# Altium PCB DAP-PCB.PcbDoc (part 5 of 5)
Units mm, origin at the board's own origin, x right, y up, seen from the top; angles counter-clockwise.
Board outline 54.75 x 54.75 mm, 6 copper layers (L1 (SIG/PWR), L2 (GND), L3 (SIG), L4 (PWR), L5 (GND), L6 (SIG/PWR)), stack 1.65 mm thick; 270 components, 172 nets, 891 pads, 308 vias.
Unrouted connection lines stored in the file: 5.
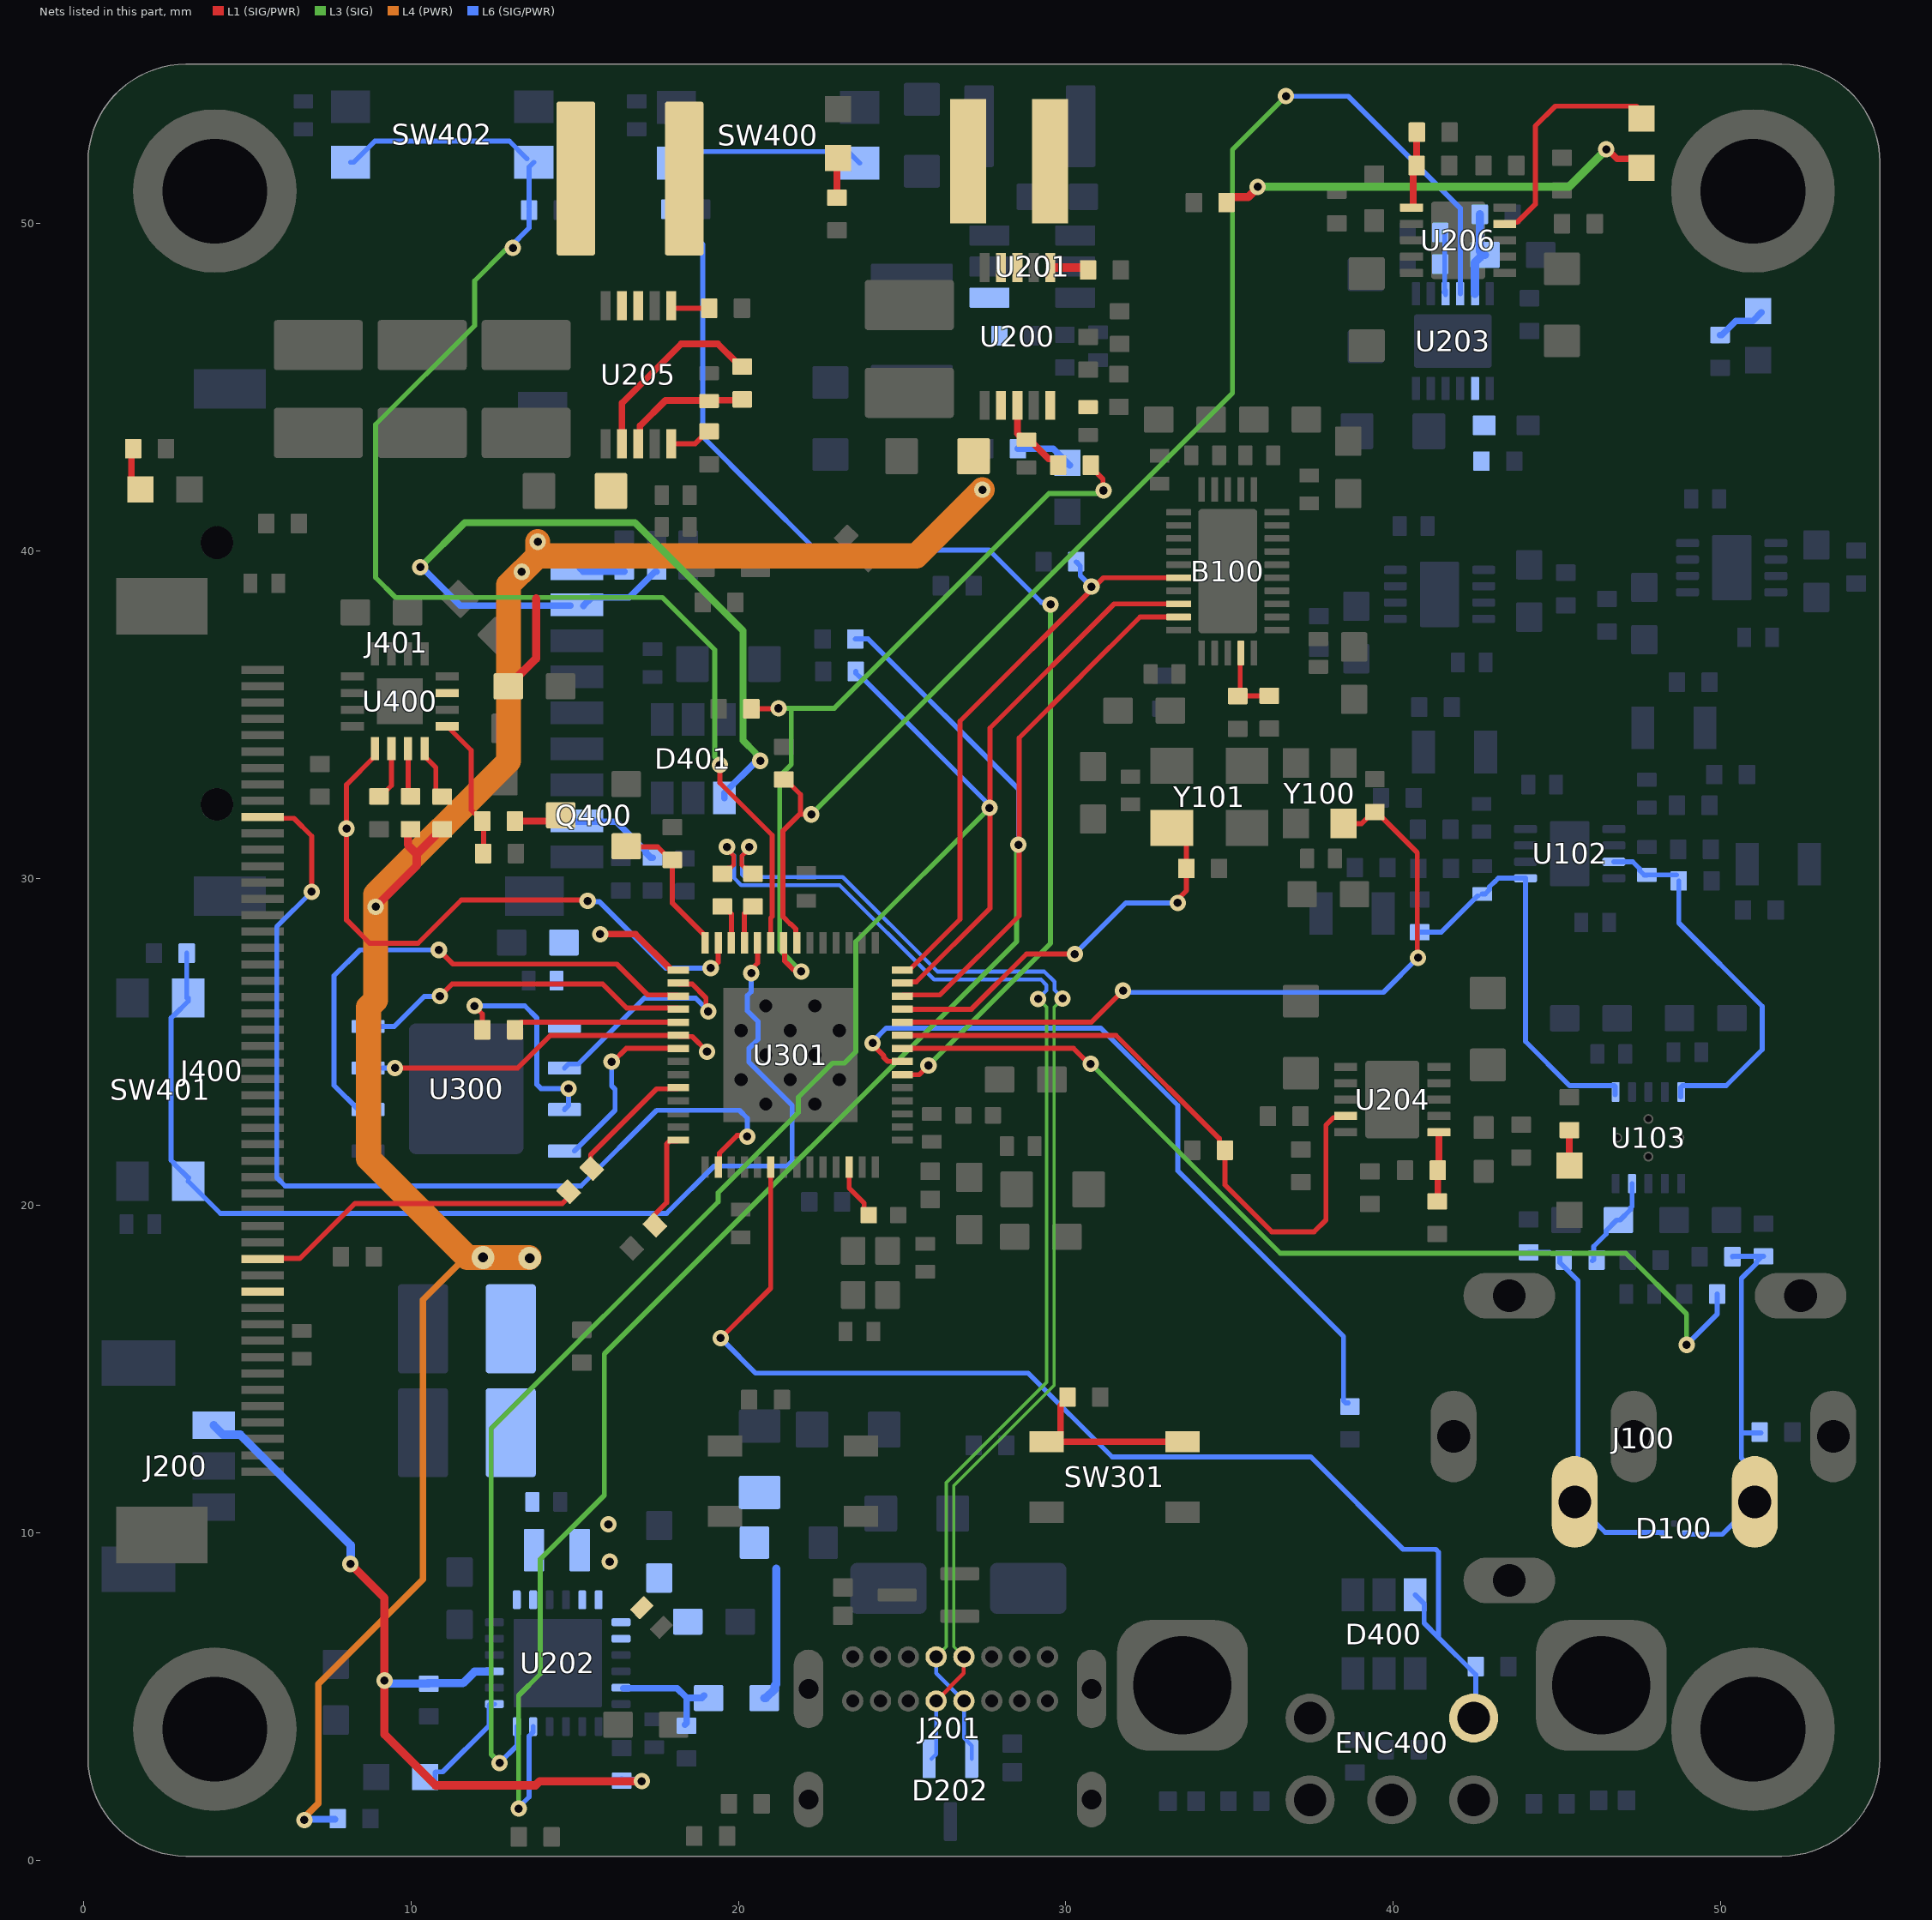
[diagram p7: the nets of this part, all layers, seen from the top]

## Via types
v1: diameter 0.5, hole 0.25, L1 (SIG/PWR) to L6 (SIG/PWR), tented both sides, 268 vias
v2: diameter 0.7, hole 0.35, L1 (SIG/PWR) to L6 (SIG/PWR), tented both sides, 23 vias
v3: diameter 0.7, hole 0.3, L1 (SIG/PWR) to L6 (SIG/PWR), tented both sides, 6 vias
v4: diameter 1.25, hole 0.75, L1 (SIG/PWR) to L6 (SIG/PWR), 6 vias
v5: diameter 0.4/0.4/0.4/0.4/0.4/0.4 (per signal layer), hole 0.2, L1 (SIG/PWR) to L6 (SIG/PWR), tented both sides, 5 vias

## Nets (pads, with @x,y where several pads share a name; then routed paths per layer and width w, separated by ;. In a path a pad name is that pad's centre, name@x,y a point inside that pad or via, vN(x,y) a via of type N, cw(c..) or ccw(c..) an arc to the next point about the centre after c; other vN are vias at no path point) (continued)
NetD204_A: D204.A R242.1 | length 13.5
  L1 (SIG/PWR) w0.203: v1@46.634,52.197 46.845,51.986 47.327,51.986 D204.A@47.6,51.713
  L1 (SIG/PWR) w0.254: R242.1@34.917,50.648 34.917,50.698 35.04,50.821 35.581,50.821 v1@35.89,51.13
  L3 (SIG) w0.254: v1@35.814,51.13 45.373,51.13 46.437,52.194 46.437,52.242 v1@46.431,52.248
  other v1: 35.865,51.13 46.517,52.274
NetD204_C: D204.C U206.4 | length 7.5
  L1 (SIG/PWR) w0.152: U206.4@43.417,49.996 43.465,50.045 43.797,50.045 44.348,50.597 44.348,52.984 44.958,53.594 47.442,53.594 D204.C@47.835,53.201
NetD205_C: D205.C R249.1 | length 1.8
  L6 (SIG/PWR) w0.203: R249.1@28.542,43.129 29.616,43.129 D205.C@30.124,42.621
NetD206_A: D206.A R250.1 | length 1.3
  L1 (SIG/PWR) w0.203: R250.1@23.012,50.8 23.012,51.892 D206.A@23.139,52.019
NetD207_A: D207.A R251.1 | length 1
  L1 (SIG/PWR) w0.203: D207.A@45.39,21.222 45.39,22.174 R251.1@45.415,22.2
NetD208_C: D208.C R252.1 | length 1.6
  L6 (SIG/PWR) w0.203: R252.1@49.994,46.601 50.044,46.601 50.478,47.035 50.998,47.035 D208.C@51.257,47.295
NetD209_A: D209.A R253.1 | length 1.2
  L1 (SIG/PWR) w0.203: R253.1@1.524,42.977 1.501,42.977 1.455,42.931 1.455,42.157 D209.A@1.727,41.885
NetD401_1: D401.1 J401.2 R416.1 | length 25.2
  L3 (SIG) w0.203: v1(10.278,39.508) 11.638,40.869 16.84,40.869 20.142,37.567 20.142,34.214 20.527,33.829 20.527,33.809 20.681,33.655 v1@20.701,33.655
  L6 (SIG/PWR) w0.203: v1@10.312,39.522 11.501,38.334 J401.2@14.861,38.334 ; J401.2@15.265,38.329 15.519,38.582 16.663,38.582 17.451,39.37 R416.1@17.501,39.37 ; D401.1@19.568,32.455 19.568,32.605 20.549,33.585 v1@20.549,33.604
  other v1: 20.666,33.59
NetJ401_1: J401.1 R417.1 | length 1.4
  L6 (SIG/PWR) w0.203: J401.1@15.164,39.472 15.257,39.378 R417.1@16.51,39.378
NetJ401_8: J401.8 R418.1 | length 3
  L6 (SIG/PWR) w0.203: J401.8@14.861,31.734 16.272,31.734 17.175,30.831 17.175,30.781 17.324,30.632 R418.1@17.374,30.632
NetQ400_1: Q400.1 R425.2 U301.28 | length 4.5
  L1 (SIG/PWR) w0.152: Q400.1@16.586,30.963 17.535,30.963 17.933,30.564 R425.2@17.983,30.564 17.983,29.243 18.984,28.243 U301.28@18.984,28.028
NetQ400_3: Q400.3 R423.1 | length 1.5
  L1 (SIG/PWR) w0.203: R423.1@13.175,31.75 14.3,31.75 Q400.3@14.554,32.004
NetR119_1: R119.1 U301.7 | length 23
  L1 (SIG/PWR) w0.152: v1(24.101,24.968) 24.101,24.916 24.441,24.576 24.441,24.524 24.559,24.407 25.005,24.407 U301.7@25.009,24.403
  L6 (SIG/PWR) w0.152: v1(24.101,24.968) 24.101,25.007 24.519,25.425 31.064,25.425 33.426,23.063 33.426,21.066 38.49,16.002 38.49,14.034 38.555,13.97 R119.1@38.633,13.97
NetR128_1: R128.1 U301.8 | length 30
  L1 (SIG/PWR) w0.152: U301.8@25.009,24.803 30.239,24.803 v1@30.683,24.359
  L3 (SIG) w0.152: v1(30.763,24.333) 36.555,18.542 47.117,18.542 48.971,16.688 48.971,15.909 49.005,15.875 v1@49.022,15.875
  L6 (SIG/PWR) w0.152: v1(48.971,15.748) 49.903,16.68 R128.1@49.903,17.297
NetR203_1: R203.1 R308.2 U301.22 | length 23.9
  L1 (SIG/PWR) w0.152: R308.2@20.396,35.179 21.158,35.179 v1@21.209,35.23 ; U301.22@21.384,28.028 21.414,27.998 21.414,27.474 21.521,27.366 21.668,27.219 21.854,27.219 v1(21.92,27.153) ; R203.1@30.769,42.621 30.769,42.571 31.14,42.2 v1@31.14,42.062
  L3 (SIG) w0.152: v1(21.226,35.196) 21.615,35.196 ; v1(21.92,27.153) 21.26,27.813 21.26,33.122 21.615,33.477 21.615,35.196 ; v1@31.166,41.758 29.489,41.758 22.927,35.196 21.615,35.196
  other v1: 31.158,41.85
NetR204_1: R204.1 U201.4
NetR207_2: R207.2 U200.1 | length 1.3
  L1 (SIG/PWR) w0.254: U200.1@29.524,48.665 30.759,48.665 R207.2@30.759,48.616
NetR219_1: R219.1 R226.2 U203.3 | length 2.1
  L6 (SIG/PWR) w0.152: U203.3@41.552,47.911 U203.3@41.58,47.939 ; R226.2@41.58,49.759 41.58,48.768 U203.3@41.58,47.939 ; U203.3@41.605,47.862 41.58,47.888 U203.3@41.58,47.939 ; U203.3@41.609,47.84 41.609,47.911 41.609,47.968 U203.3@41.58,47.939
NetR220_1: R220.1 R224.2 U203.5 | length 2.6
  L6 (SIG/PWR) w0.254: U203.5@42.505,47.862 42.505,48.816 42.666,48.977 R220.1@42.736,49.047 ; R224.2@42.655,50.292 42.655,49.155 42.763,49.047 R220.1@42.813,49.047
NetR222_1: R222.1 R228.2 U204.6 | length 2.1
  L1 (SIG/PWR) w0.203: R222.1@41.326,20.168 41.369,20.21 R228.2@41.369,21.082 41.405,21.118 U204.6@41.405,22.241
NetR223_1: R223.1 U204.4 U301.9 | length 19.8
  L1 (SIG/PWR) w0.152: U301.9@25.009,25.202 31.541,25.202 34.692,22.051 34.692,21.915 34.738,21.869 R223.1@34.874,21.869 ; R223.1@34.866,21.692 34.866,20.633 36.297,19.202 37.592,19.202 37.951,19.561 37.951,22.462 38.18,22.692 38.506,22.692 U204.4@38.555,22.741
NetR238_1: R238.1 U205.10 | length 1.3
  L1 (SIG/PWR) w0.152: U205.10@17.942,43.283 18.679,43.283 19.033,43.637 R238.1@19.126,43.637
NetR239_2: R239.2 U205.1 | length 1.2
  L1 (SIG/PWR) w0.152: U205.1@17.942,47.497 18.017,47.422 19.101,47.422 R239.2@19.126,47.447
NetR243_1: R243.1 R245.2 U206.6 | length 2.3
  L1 (SIG/PWR) w0.203: U206.6@40.615,50.521 40.615,51.675 R245.2@40.722,51.782 40.726,51.786 40.726,52.689 R243.1@40.818,52.781
NetR302_2: R302.2 SW301.1 SW301.2 | length 5.9
  L1 (SIG/PWR) w0.203: R302.2@30.056,14.148 30.056,14.098 29.844,13.886 29.844,13.008 29.621,12.784 SW301.1@29.421,12.784 33.536,12.784 SW301.2@33.553,12.802
NetR303_2: R303.2 U301.38 | length 4
  L1 (SIG/PWR) w0.152: R303.2@15.482,21.149 15.482,21.553 17.498,23.569 18.125,23.569 U301.38@18.159,23.603 ; R303.2@15.658,21.096 R303.2@15.723,21.031
NetR304_1: R304.1 U301.25 | length 1.2
  L1 (SIG/PWR) w0.152: U301.25@20.184,28.028 20.184,28.929 20.338,29.083 R304.1@20.371,29.083
NetR305_2: R305.2 U301.42 | length 2.8
  L1 (SIG/PWR) w0.152: R305.2@17.399,19.685 17.805,20.091 17.805,21.879 17.895,21.969 18.125,21.969 U301.42@18.159,22.003
NetR306_1: R306.1 U301.26 | length 1.1
  L1 (SIG/PWR) w0.152: R306.1@19.685,29.083 19.685,29.014 19.784,28.915 U301.26@19.784,28.028
NetR420_2: R420.2 U400.3 | length 1.6
  L1 (SIG/PWR) w0.152: U400.3@9.906,33.96 9.906,32.563 R420.2@10.033,32.436
NetR421_2: R421.2 U400.4 | length 1.7
  L1 (SIG/PWR) w0.152: U400.4@10.414,33.96 10.414,33.729 10.754,33.39 10.754,32.604 R421.2@10.897,32.461
NetR422_2: R422.2 U400.2 | length 1.6
  L1 (SIG/PWR) w0.152: R422.2@9.068,32.537 9.1,32.537 9.398,32.835 U400.2@9.398,33.96
NetR423_2: R423.2 R424.2 U400.5 | length 4.4
  L1 (SIG/PWR) w0.152: U400.5@11.1,34.646 11.836,33.909 11.836,32.088 11.951,31.974 12.001,31.974 12.175,31.8 R423.2@12.175,31.75 ; R424.2@12.217,30.734 R423.2@12.217,31.75
NetU301_27: U301.27 U400.1 | length 19.4
  L1 (SIG/PWR) w0.152: U400.1@8.89,33.96 8.89,33.729 8.026,32.866 v1(8.026,31.521) 8.026,28.727 8.738,28.016 10.211,28.016 11.532,29.337 15.367,29.337 v1(15.392,29.312) ; v1@19.177,27.229 19.384,27.436 U301.27@19.384,28.028
  L6 (SIG/PWR) w0.152: v1(15.392,29.312) 15.413,29.291 15.744,29.291 17.774,27.26 v1@19.222,27.26
  other v1: 19.151,27.26
PG_LDO-: R241.1 U203.4 U301.21 | length 43.3
  L1 (SIG/PWR) w0.152: R241.1@21.387,33.02 21.437,33.02 21.895,32.562 21.895,31.953 v1(22.225,31.953) ; U301.21@21.784,28.028 21.75,28.061 21.75,28.456 21.599,28.607 21.584,28.607 21.363,28.828 21.363,31.455 21.861,31.953
  L3 (SIG) w0.152: v1(22.225,31.953) 35.097,44.825 35.097,52.267 v1(36.728,53.899)
  L6 (SIG/PWR) w0.152: v1(36.728,53.899) 38.633,53.899 42.055,50.477 U203.4@42.055,47.862
PMID_BQ: C200.2 U202.20
POWER: R401.2 SW401.1 SW401.3 U301.24 | length 34.5
  L1 (SIG/PWR) w0.152: v1@20.345,27.178 20.584,27.416 U301.24@20.584,28.028
  L6 (SIG/PWR) w0.152: SW401.1@3.142,26.346 R401.2@3.142,27.711 ; SW401.3@3.187,20.746 3.187,20.744 4.169,19.761 17.805,19.761 19.253,21.209 21.488,21.209 21.641,21.361 21.641,23.063 20.32,24.384 20.32,24.802 20.599,25.081 20.599,25.624 20.269,25.954 20.269,26.416 20.392,26.538 20.392,27.157 v1@20.371,27.178 ; SW401.1@3.187,26.346 3.187,26.246 2.763,25.822 2.756,25.822 2.667,25.733 2.667,21.387 2.763,21.291 2.763,21.27 3.179,20.853 SW401.3@3.2,20.853
  other v1: 20.392,27.106
RESET: J400.10 U301.44 | length 30.4
  L1 (SIG/PWR) w0.152: J400.10@5.207,31.883 5.256,31.834 6.418,31.834 6.96,31.293 v1(6.96,29.591) ; U301.44@19.384,21.178 19.417,21.211 19.417,21.606 19.961,22.149 v1@20.244,22.149
  L6 (SIG/PWR) w0.152: v1(6.96,29.591) 5.893,28.524 5.893,20.853 6.147,20.599 15.189,20.599 17.503,22.914 20.029,22.914 20.269,22.674 v1@20.269,22.149
  other v1: 20.269,22.111
RESETB_DAC: B100.21 R111.2 U301.14 | length 17.9
  L1 (SIG/PWR) w0.152: U301.14@25.009,27.203 25.224,27.203 26.772,28.75 26.772,34.806 31.152,39.186 B100.21@33.452,39.186
  L6 (SIG/PWR) w0.152: R111.2@30.324,39.671 30.446,39.548 30.446,39.251 v1(30.785,38.913)
RIGHT_EAR: C124.1 R125.1 U103.9 | length 2.9
  L6 (SIG/PWR) w0.152: R125.1@46.097,18.313 46.132,18.349 46.132,18.753 46.514,19.134 46.514,19.234 46.837,19.558 46.937,19.558 47.261,19.882 47.261,19.932 47.304,19.975 U103.9@47.304,20.673
RING: D100.3 J100.3 R117.2 R125.2 | length 12.8
  L6 (SIG/PWR) w0.152: R117.2@44.145,18.575 44.784,18.575 44.822,18.537 45.046,18.537 45.097,18.487 R125.2@45.097,18.313 ; R125.2@45.097,18.263 45.656,17.705 J100.3@45.656,10.846 ; J100.3@45.554,10.947 J100.3@45.656,10.846 ; J100.3@45.656,9.906 J100.3@45.656,10.846 ; D100.3@48.237,10.008 48.163,10.008 48.154,10.017 46.484,10.017 J100.3@45.656,10.846
SCL_BQ: B100.23 R208.1 U202.6 U301.13 | length 59.5
  L1 (SIG/PWR) w0.152: U301.13@25.009,26.803 25.043,26.836 25.437,26.836 27.686,29.086 27.686,32.151 27.686,34.595 31.477,38.386 B100.23@33.452,38.386
  L3 (SIG) w0.152: v1(12.7,2.972) 12.7,2.981 12.446,3.235 12.446,13.183 19.38,20.117 19.38,20.396 21.83,22.846 21.83,23.311 22.875,24.356 23.239,24.356 23.588,24.705 23.588,28.066 27.678,32.156 v1@27.686,32.156
  L6 (SIG/PWR) w0.152: v1(12.7,2.972) 13.228,3.5 U202.6@13.228,4.085 ; R208.1@23.589,36.322 23.589,36.272 23.762,36.098 23.812,36.098 v1@27.741,32.169
  other v1: 27.673,32.151
SCL_LCD: J400.37 R303.1 | length 10.4
  L1 (SIG/PWR) w0.152: J400.37@5.207,18.383 6.597,18.383 8.28,20.066 14.617,20.066 14.783,20.231 R303.1@14.783,20.295
SDA_BQ: B100.24 R211.1 U202.5 U301.12 | length 63.6
  L1 (SIG/PWR) w0.152: U301.12@25.009,26.402 25.043,26.436 26.157,26.436 28.575,28.854 28.575,34.29 30.459,36.174 ; 30.48,36.195 32.271,37.986 B100.24@33.452,37.986
  L3 (SIG) w0.152: v1(13.284,1.575) 13.284,5.029 13.945,5.69 13.945,9.195 15.9,11.151 15.9,15.469 28.497,28.065 v1@28.497,31.168 ; v1@28.575,30.97 v1@28.575,30.988
  L6 (SIG/PWR) w0.152: v1(13.284,1.575) 13.284,1.616 13.602,1.934 13.602,3.789 13.728,3.915 U202.5@13.728,4.085 ; R211.1@23.571,37.313 23.579,37.321 23.961,37.321 28.556,32.725 v1(28.556,31.027)
SELECT: D400.3 ENC400.5 R412.2 U301.48 | length 37.6
  L1 (SIG/PWR) w0.152: v1(19.456,15.951) 20.984,17.479 U301.48@20.984,21.178
  L6 (SIG/PWR) w0.152: v1@19.507,15.85 19.558,15.85 20.523,14.884 28.854,14.884 31.42,12.319 37.49,12.319 40.31,9.5 41.304,9.5 41.393,9.411 41.393,6.799 ; D400.3@40.676,8.109 40.95,7.835 40.95,7.242 41.393,6.799 ; ENC400.5@42.465,4.343 42.528,4.343 42.528,5.664 41.393,6.799
SET_LDO-: C222.2 R232.2 U203.8
SHDN_BB_3.3: C230.2 R237.2 U205.8 | length 4
  L1 (SIG/PWR) w0.203: U205.8@16.942,43.283 16.993,43.334 16.993,43.826 17.769,44.602 C230.2@19.228,44.602 ; C230.2@19.228,44.61 20.073,44.61 R237.2@20.091,44.628
SHDN_BB_3.9: C213.2 R203.2 U200.8 | length 2.4
  L1 (SIG/PWR) w0.203: U200.8@28.524,44.451 28.524,43.594 28.684,43.434 C213.2@28.804,43.434 ; C213.2@28.804,43.402 28.891,43.402 29.473,42.82 29.621,42.82 R203.2@29.718,42.723
SPI_CS0: U300.1 U301.32 | length 10.4
  L1 (SIG/PWR) w0.152: v1(10.878,26.399) 11.25,26.772 15.85,26.772 16.583,26.039 17.821,26.039 17.823,26.036 18.125,26.036 U301.32@18.159,26.003
  L6 (SIG/PWR) w0.152: U300.1@8.684,25.476 9.484,25.476 10.399,26.391 10.897,26.391 v1@10.947,26.441
SPI_D: U300.5 U301.35 | length 5.5
  L1 (SIG/PWR) w0.152: v1(16.126,24.399) 16.169,24.399 16.573,24.803 U301.35@18.159,24.803
  L6 (SIG/PWR) w0.152: U300.5@14.986,21.668 16.231,22.913 16.231,23.556 16.126,23.661 v1(16.126,24.399)
SPI_HD: U300.7 U301.30 | length 6.9
  L1 (SIG/PWR) w0.152: U301.30@18.159,26.803 18.193,26.769 18.587,26.769 19.009,26.346 19.009,26 v1(19.076,25.933)
  L6 (SIG/PWR) w0.152: U300.7@14.684,24.206 14.808,24.33 15.11,24.33 17.12,26.34 18.694,26.34 19.076,25.958 v1(19.076,25.933)
SPI_Q: U300.2 U301.34 | length 11
  L1 (SIG/PWR) w0.152: v1@9.5,24.155 9.55,24.206 13.257,24.206 14.253,25.202 U301.34@18.159,25.202 18.193,25.169 18.587,25.169 19.04,24.715 v1(19.04,24.702)
  L6 (SIG/PWR) w0.152: U300.2@8.684,24.206 8.896,24.206 8.921,24.182 8.946,24.206 9.474,24.206 v1@9.5,24.181
  other v1: 9.506,24.206
SPI_WP: U300.3 U301.31 | length 16.1
  L1 (SIG/PWR) w0.152: v1(10.846,27.813) 11.278,27.381 16.281,27.381 17.226,26.436 18.125,26.436 U301.31@18.159,26.402
  L6 (SIG/PWR) w0.152: U300.3@8.684,22.936 8.384,22.936 7.645,23.675 7.645,27.026 8.433,27.813 10.795,27.813 v1@10.82,27.838
SPICLK: R307.2 U301.33 | length 5
  L1 (SIG/PWR) w0.152: R307.2@13.233,25.476 13.233,25.483 13.353,25.603 U301.33@18.159,25.603
SPICLK_FL: R307.1 U300.6 | length 6.6
  L1 (SIG/PWR) w0.152: v1@11.948,26.152 11.948,26.079 12.175,25.852 R307.1@12.175,25.375
  L6 (SIG/PWR) w0.152: v1@12.04,26.162 12.04,26.158 12.096,26.102 13.471,26.102 13.843,25.73 13.843,23.698 13.963,23.578 v1(14.808,23.578) 14.808,23.06 U300.6@14.684,22.936
  other v1: 11.935,26.102
STAT_BQ: D200.C U202.7 | length 3.3
  L6 (SIG/PWR) w0.152: D200.C@10.726,2.457 10.726,2.673 10.751,2.698 10.967,2.698 12.377,4.109 12.377,4.726 12.421,4.77 U202.7@12.543,4.77
SUMM_L: C123.1 R115.2 U102.7 U103.5 | length 11.6
  L6 (SIG/PWR) w0.152: U102.7@46.75,30.505 47.328,30.505 47.534,30.299 47.534,30.242 47.678,30.099 C123.1@47.752,30.099 ; C123.1@47.758,30.106 R115.2@48.66,30.106 ; R115.2@48.731,29.921 48.731,28.639 51.283,26.088 51.283,24.765 50.184,23.667 48.848,23.667 48.793,23.612 U103.5@48.793,23.317
SUMM_R: C118.1 R114.2 U102.1 U103.1 | length 12.4
  L6 (SIG/PWR) w0.152: R114.2@40.818,28.354 41.474,28.354 42.584,29.464 C118.1@42.596,29.464 ; C118.1@42.729,29.522 42.816,29.522 42.953,29.658 42.953,29.746 43.113,29.905 43.119,29.905 43.219,30.005 U102.1@44.05,30.005 44.05,25.013 45.396,23.667 46.76,23.667 46.787,23.64 U103.1@46.787,23.393
SW1_BB_3.3: L204.1 U205.3
SW1_BB_3.9: L200.1 U200.3
SW2_BB_3.3: L204.2 U205.4
SW2_BB_3.9: L200.2 U200.4
SW_BQ: C207.1 L203.1 U202.17 U202.18
  other v1: 16.067,9.119 16.027,10.262
SYS: C203.2 C208.2 C209.2 C210.2 C224.2 C412.2 L203.2 R206.2 R237.1 R420.1 R421.1 U200.7 U202.13 U202.14 U205.7 U400.7 | length 74.7
  L1 (SIG/PWR) w0.203: U205.7@16.442,43.283 16.442,44.521 18.251,46.33 19.373,46.33 19.932,45.771 R237.1@20.168,45.771
  L1 (SIG/PWR) w0.254: v1(8.915,29.134) 10.173,30.391 10.173,30.747 10.774,31.348 10.774,31.373 10.847,31.445 R421.1@10.871,31.445 ; R420.1@10.033,31.471 9.988,31.471 9.898,31.381 9.898,31.022 10.161,30.759 ; C412.2@12.967,35.865 13.017,35.865 13.29,36.138 13.29,36.188 13.818,36.716 13.818,38.557
  L4 (PWR) w0.203: v1(6.737,1.23) 6.737,1.31 7.163,1.736 7.163,5.385 10.363,8.585 10.363,17.12 11.608,18.364
  L4 (PWR) w0.762: v1(13.375,39.369) 12.979,38.973 12.979,33.579 8.915,29.515 8.915,26.281 8.697,26.063 8.697,21.438 11.72,18.415 v3(12.192,18.415) v3@13.605,18.415 ; v1@13.385,39.369 13.868,39.853 ; v1(13.868,40.284) 13.868,39.853 ; v1(27.455,41.876) 25.433,39.853 13.868,39.853
  L6 (SIG/PWR) w0.203: v1(6.737,1.23) 6.757,1.25 7.666,1.25 R206.2@7.671,1.245
  other v3: 13.626,18.393
TE: J400.39
TIP: D100.2 J100.2 R127.2 R129.2 R134.2 | length 12.3
  L6 (SIG/PWR) w0.152: D100.2@48.909,9.961 49.017,9.961 49.021,9.957 50.063,9.957 J100.2@51.054,10.947 J100.2@51.198,11.091 ; R127.2@50.372,18.44 50.38,18.448 R134.2@51.32,18.448 51.27,18.448 51.096,18.275 51.096,18.225 50.648,17.776 50.648,13.005 ; J100.2@51.156,11.775 50.648,12.283 50.648,13.005 ; J100.2@51.198,10.944 J100.2@51.198,11.091 ; J100.2@51.198,11.775 J100.2@51.198,11.091 ; R129.2@51.24,13.056 50.698,13.056 50.648,13.005
TRI_STATE_22: R106.2 U301.10 Y100.1 | length 22.7
  L1 (SIG/PWR) w0.152: U301.10@25.009,25.603 30.784,25.603 v1(31.75,26.568) ; Y100.1@38.483,31.674 39.041,31.674 R106.2@39.421,32.054 ; R106.2@39.446,32.029 39.496,32.029 40.742,30.784 v1@40.742,27.686
  L6 (SIG/PWR) w0.152: v1(31.75,26.568) 31.801,26.518 39.706,26.518 40.798,27.61 v1@40.843,27.61
  other v1: 40.763,27.575
TRI_STATE_24: R107.2 U301.11 Y101.1 | length 12.2
  L1 (SIG/PWR) w0.152: U301.11@25.009,26.003 27.12,26.003 28.804,27.686 v1(30.277,27.686) ; Y101.1@33.241,31.537 33.688,31.09 R107.2@33.688,30.421 ; v1@33.376,29.312 33.688,29.624 R107.2@33.688,30.302
  L6 (SIG/PWR) w0.152: v1(30.277,27.686) 31.842,29.251 33.442,29.251 v1@33.452,29.261
  other v1: 33.422,29.251
TS: J200.3 R214.1 R215.2 U202.9 | length 24.4
  L1 (SIG/PWR) w0.254: v1(8.143,9.053) 9.184,8.011 9.184,5.522 v1@9.195,5.512 ; v1(9.184,5.489) 9.184,3.846 10.744,2.286 13.8,2.286 13.925,2.412 v1(17.047,2.412)
  L6 (SIG/PWR) w0.254: J200.3@3.964,13.29 4.25,13.004 4.776,13.004 8.153,9.627 v1@8.153,9.093 ; v1@9.195,5.478 9.279,5.394 R215.2@10.541,5.394 ; R215.2@10.508,5.41 11.582,5.41 11.935,5.763 U202.9@12.38,5.763 ; R214.1@16.434,2.429 16.442,2.42 17.039,2.42 v1(17.047,2.412)
USB_D_N: D202.1 J201.A7 J201.B7 R304.2 | length 38.7
  L1 (SIG/PWR) w0.121: J201.B7@26.042,4.864 26.886,5.708 26.886,6.159 J201.A7@26.899,6.172
  L1 (SIG/PWR) w0.131: v1(20.326,30.963) 20.326,30.911 20.106,30.69 20.106,30.403 20.183,30.326 20.262,30.326 R304.2@20.447,30.142
  L3 (SIG) w0.101: J201.A7@26.892,6.214 26.581,6.525 26.581,11.442 29.645,14.506 29.645,26.064 29.903,26.321 v1(29.903,26.328)
  L6 (SIG/PWR) w0.121: v1(20.326,30.963) 20.326,30.917 20.112,30.702 20.112,30.547 20.112,30.112 20.183,30.042 23.191,30.042 26.08,27.153 29.348,27.153 29.655,26.846 29.655,26.588 29.903,26.341 v1(29.903,26.328) ; D202.1@25.903,3.099 26.043,3.238 26.043,4.863 J201.B7@26.042,4.864
USB_D_P: D202.2 J201.A6 J201.B6 R306.2 | length 38.6
  L1 (SIG/PWR) w0.131: R306.2@19.507,30.142 19.692,30.326 19.772,30.326 19.848,30.403 19.848,30.7 19.649,30.9 v1(19.649,30.962)
  L3 (SIG) w0.101: J201.A6@26.042,6.214 26.353,6.525 26.353,11.537 29.417,14.601 29.417,26.064 29.166,26.314 v1(29.159,26.314)
  L6 (SIG/PWR) w0.121: v1(19.649,30.962) 19.649,30.917 19.865,30.701 19.865,30.445 19.865,30.01 20.08,29.794 23.089,29.794 25.978,26.905 29.245,26.905 29.407,26.743 29.407,26.575 29.159,26.327 v1(29.159,26.314) ; J201.A6@26.035,6.121 26.048,6.109 26.048,5.708 J201.B6@26.892,4.864 26.892,3.729 27.127,3.494 D202.2@27.127,3.099
VC_BB_3.9: C212.2 U200.10
VDD_SPI: C311.2 C312.2 U300.8 U301.29 | length 2.8
  L1 (SIG/PWR) w0.203: v1(15.773,28.296) 16.851,28.296 17.944,27.203 U301.29@18.159,27.203
VDPM_BQ: R202.1 R205.2 U202.23 | length 3.5
  L6 (SIG/PWR) w0.203: U202.23@16.485,5.251 18.125,5.251 18.415,4.961 ; R205.2@18.364,4.14 18.415,4.191 18.415,4.961 ; R202.1@18.948,5.029 18.88,4.961 18.415,4.961
VOLUME+: R404.2 SW400.1 SW400.3 U301.6 | length 44
  L1 (SIG/PWR) w0.152: U301.6@25.009,24.003 25.527,24.003 v1(25.806,24.282)
  L3 (SIG) w0.152: v1(25.806,24.282) 29.536,28.012 29.536,38.375 v1@29.54,38.379
  L6 (SIG/PWR) w0.152: R404.2@17.89,50.444 17.89,50.394 18.913,49.371 18.913,43.486 20.596,41.803 22.369,40.03 27.661,40.03 29.257,38.434 29.47,38.434 v1(29.536,38.367) ; R404.2@17.89,50.495 18.104,50.709 SW400.3@18.104,51.855 18.458,52.209 23.35,52.209 SW400.1@23.704,51.855
VOLUME-: R406.2 SW402.1 SW402.3 U301.23 | length 41.7
  L1 (SIG/PWR) w0.152: v1@19.431,33.553 19.431,32.918 21.031,31.318 21.031,28.834 20.984,28.787 U301.23@20.984,28.028
  L3 (SIG) w0.152: v1(13.108,49.264) 13.042,49.198 12.876,49.198 11.938,48.26 11.938,46.888 8.915,43.866 8.915,39.192 9.525,38.583 17.678,38.583 19.279,36.982 19.279,33.714 19.433,33.56 v1(19.433,33.465)
  L6 (SIG/PWR) w0.152: SW402.3@8.147,51.88 8.247,51.88 8.894,52.527 13.001,52.527 13.534,51.994 SW402.1@13.538,51.994 ; v1@13.03,49.301 13.605,49.876 R406.2@13.605,50.419 ; R406.2@13.605,50.486 13.605,51.738 SW402.1@13.747,51.88
VUSB: C202.2 FB200.2 R202.2 R227.2 U202.19 | length 4.1
  L6 (SIG/PWR) w0.254: R202.2@20.789,4.953 20.839,4.953 21.112,5.226 21.112,5.329 21.158,5.375 21.158,8.901
XI: B100.29 R104.2 R105.1 | length 2
  L1 (SIG/PWR) w0.152: R105.1@35.255,35.569 35.331,35.646 B100.29@35.331,36.678 ; R105.1@35.331,35.577 R104.2@36.22,35.577
XTAL_P: L301.2 U301.54 | length 1.7
  L1 (SIG/PWR) w0.152: U301.54@23.384,21.178 23.384,20.533 23.842,20.075 L301.2@23.842,19.709
pads on no net: B100.4 B100.5 B100.6 B100.7 B100.26 B100.28 D400.6 ENC400.6 ENC400.7 J100.5 J201.A8 J201.B8 J400.44 J400.45 J400.46 J400.47 J400.S1 J400.S2 J401. U203.7 U301.1 U301.49 U301.52
copper on no net:
  other v4: 0.962,23.546 3.712,23.546 20.904,51.33 10.947,51.355 20.904,54.08 10.947,54.105

## Polygon pours and split planes (outlines as drawn)
GND on L1 (SIG/PWR) "GND_L01_P134" (solid, pour order 134): 42.113,28.016 42.113,25.883 43.79,25.883 43.79,28.016 42.418,28.016
GND on L1 (SIG/PWR) "GND_L01_P133" (solid, pour order 133): 35.458,27.584 35.458,20.549 37.389,18.618 45.872,18.618 45.872,20.269 45.745,20.396 44.577,20.396 44.577,23.495 40.996,23.495 40.996,27.584
GND on L1 (SIG/PWR) "GND_L01_P132" (solid, pour order 132): 29.489,20.879 28.727,21.641 28.727,22.225 32.283,22.225 32.283,18.466 29.489,18.466
GND on L1 (SIG/PWR) "GND_L01_P131" (solid, pour order 131): 23.698,15.729 25.94,15.729 27.635,17.424 27.635,19.685 27.051,20.269 25.552,20.269 25.552,18.263 25.298,18.263 25.121,18.085 23.978,18.085 23.978,19.253 23.114,19.253 23.114,18.085 23.317,17.882 24.054,17.882 24.054,16.789 23.698,16.434
GND on L1 (SIG/PWR) "GND_L01_P130" (solid, pour order 130): 23.647,2.794 45.644,2.794 45.644,0.127 26.314,0.127 26.318,0.123 3.15,0.123 cw(c3.15,3.15) 0.123,3.15 0.123,51.877 cw(c3.123,51.877) 3.123,54.877 51.877,54.877 cw(c51.877,51.89) 54.864,51.89 54.864,41.709 26.552,41.709 18.408,33.565 18.408,18.669 19.069,19.329 20.422,19.329 20.422,17.932 19.66,17.17 18.408,17.17 18.408,11.43 23.647,11.43 25.502,13.284 26.365,13.284 26.365,11.201 24.816,9.652 18.408,9.652 18.408,8.033
+3V3_DIG on L1 (SIG/PWR) "Top Layer (Sig)-+3V3_DIG" (solid, pour order 129): 27.815,18.566 29.085,18.566 29.085,21.029 28.678,21.436 28.501,21.436 28.501,23.036 27.434,23.036 27.434,22.376 27.815,22.376 27.815,22.249 26.924,22.249 26.924,21.512 23.675,21.512 23.675,20.725 26.215,20.725 26.545,20.394 27.815,20.394
+3V3_DIG on L1 (SIG/PWR) "+3V3_DIG_L01_P127" (solid, pour order 127): 22.073,27.711 22.073,28.753 21.768,29.058 21.768,29.515 22.403,29.515 22.403,28.88 22.301,28.778 22.301,27.711 22.123,27.711
NetC302_2 on L1 (SIG/PWR) "NETC302_2_L01_P070" (solid, pour order 70): 24.691,22.299 25.503,22.299 25.656,22.452 27.154,22.452 27.154,23.061 25.656,23.061 25.529,22.934 24.691,22.934
+3V3_DIG on L1 (SIG/PWR) "+3V3_DIG_L01_P072" (solid, pour order 72): 20.068,21.512 20.068,19.683 20.296,19.683 20.296,21.512
+3V3_ANALOG on L1 (SIG/PWR) "+3V3_ANALOG_L01_P094" (solid, pour order 94): 30.328,34.112 33.985,34.112 33.985,32.715 30.328,32.715 30.328,33.96
+3V3_ANALOG on L1 (SIG/PWR) "+3V3_ANALOG_L01_P095" (solid, pour order 95): 36.576,32.207 36.576,29.007 37.77,29.007 37.77,32.207
+3V3_ANALOG on L1 (SIG/PWR) "+3V3_ANALOG_L01_P063" (solid, pour order 63): 41.885,24.867 41.885,25.527 41.021,25.527 41.021,23.622 43.688,23.622 43.688,24.867
+3V3_DAC on L1 (SIG/PWR) "+3V3_DAC_L01_P098" (solid, pour order 98): 39.192,42.266 39.192,41.097 36.068,41.097 36.068,41.808 37.897,41.808 37.897,41.986 38.176,42.266
GND on L1 (SIG/PWR) "GND_L01_P126" (solid, pour order 126): 36.119,42.113 37.744,42.113 38.532,42.901 39.065,42.901 39.065,44.272 37.846,45.491 37.186,45.491 36.601,44.907 36.601,43.688 36.119,43.205
+3V9 on L1 (SIG/PWR) "+3V9_L01_P059" (solid, pour order 59): 46.736,51.283 45.669,51.283 45.669,49.124 43.078,49.124 43.078,48.133 46.736,48.133
SYS on L1 (SIG/PWR) "SYS_L01_P120" (solid, pour order 120): 15.291,40.843 12.954,40.843 12.954,38.329 16.612,38.329 16.612,43.713 16.281,43.713 16.281,42.545 15.291,42.545
BOOT_BQ on L1 (SIG/PWR) "BOOT_BQ_L01_P118" (solid, pour order 118): 17.602,7.595 17.221,7.214 17.221,6.655 18.237,5.639 19.355,5.639 19.355,6.35 18.11,7.595
SW_BQ on L1 (SIG/PWR) "SW_BQ_L01_P117" (solid, pour order 117): 17.551,7.899 16.993,7.341 15.621,7.341 15.621,10.744 16.231,10.744 17.551,9.423 17.551,7.976
+3V9 on L1 (SIG/PWR) "+3V9_L01_P021" (solid, pour order 21): 21.082,48.616 22.631,48.616 22.631,46.406 27.686,46.406 27.686,43.993 21.082,43.993
+3V9 on L1 (SIG/PWR) "+3V9_L01_P066" (solid, pour order 66): 38.913,23.546 37.77,23.546 37.033,23.546 36.449,22.962 36.449,22.301 35.89,22.301 35.89,25.349 38.913,25.349
+3V3_DAC on L1 (SIG/PWR) "+3V3_DAC_L01_P096" (solid, pour order 96): 32.639,34.595 34.646,34.595 34.646,37.262 34.442,37.262 34.442,36.474 34.239,36.271 33.858,36.271 33.858,36.652 33.122,36.652 33.122,35.712 32.614,35.712 32.614,34.646
+3V3_DAC on L1 (SIG/PWR) "+3V3_DAC_L01_P100" (solid, pour order 100): 36.093,37.694 39.446,37.694 39.446,36.424 38.532,36.424 38.151,36.805 36.093,36.805
+3V3_DAC on L1 (SIG/PWR) "+3V3_DAC_L01_P057" (solid, pour order 57): 40.919,49.124 38.659,49.124 38.659,47.981 40.919,47.981
DVDD on L1 (SIG/PWR) "DVDD_L01_P097" (solid, pour order 97): 32.563,41.504 34.265,41.504 34.265,42.393 32.563,42.393
+3V3_DIG on L1 (SIG/PWR) "+3V3_DIG_L01_P093" (solid, pour order 93): 35.049,41.518 35.049,45.618 33.982,45.618 33.982,43.652 34.341,43.293 34.341,42.585 34.591,42.585 34.845,42.331 34.845,41.518 34.947,41.518
+3V3_DAC on L1 (SIG/PWR) "+3V3_DAC_L01_P092" (solid, pour order 92): 35.255,41.529 35.255,44.729 36.322,44.729 36.322,43.663 35.916,43.256 35.916,42.596 35.712,42.596 35.458,42.342 35.458,41.529 35.357,41.529
EN_DAC_LDO+ on L1 (SIG/PWR) "EN_DAC_LDO+_L01_P091" (solid, pour order 91): 43.078,49.632 43.891,49.632 44.602,50.343 44.602,51.333 45.491,51.333 45.491,49.378 43.078,49.378
SW2_BB_3.9 on L1 (SIG/PWR) "SW2_BB_3.9_L01_P019" (solid, pour order 19): 28.179,48.222 27.874,48.222 27.874,49.264 27.213,49.924 25.41,49.924 25.41,54 27.965,54 27.965,50.036 28.179,49.822
SW1_BB_3.9 on L1 (SIG/PWR) "SW1_BB_3.9_L01_P020" (solid, pour order 20): 28.372,48.184 28.677,48.184 28.677,49.276 29.286,49.886 31.14,49.886 31.14,54 28.677,54 28.677,50.089 28.372,49.784
SYS on L1 (SIG/PWR) "SYS_L01_P022" (solid, pour order 22): 28.172,41.478 28.172,44.905 27.868,44.905 27.868,43.838 27.817,43.788 26.67,43.788 26.67,41.478
VC_BB_3.9 on L1 (SIG/PWR) "VC_BB_3.9_L01_P023" (solid, pour order 23): 30.988,44.907 29.362,44.907 29.362,43.993 30.988,43.993
NetC212_1 on L1 (SIG/PWR) "NETC212_1_L01_P024" (solid, pour order 24): 31.318,44.653 31.318,44.044 31.039,43.764 30.353,43.764 30.353,43.256 31.928,43.256 31.928,44.653
FB_BB_3.9 on L1 (SIG/PWR) "FB_BB_3.9_L01_P080" (solid, pour order 80): 31.979,45.11 31.979,46.609 31.293,46.609 31.293,46.279 30.886,45.872 30.201,45.872 30.201,45.11
FB_BB_3.3 on L1 (SIG/PWR) "FB_BB_3.3_L01_P017" (solid, pour order 17): 17.297,38.1 19.406,38.1 19.406,40.107 18.034,40.107 18.034,40.488 17.932,40.589 17.932,42.24 17.577,42.596 17.577,43.713 17.297,43.739
NetC226_2 on L1 (SIG/PWR) "NETC226_2_L01_P016" (solid, pour order 16): 19.38,42.901 18.288,42.901 18.288,41.402 19.406,41.402 19.406,42.875
SW1_BB_3.3 on L1 (SIG/PWR) "SW1_BB_3.3_L01_P015" (solid, pour order 15): 16.776,47.032 17.081,47.032 17.081,48.074 17.742,48.734 19.545,48.734 19.545,53.89 17.869,53.89 17.386,53.408 17.386,49.242 16.776,48.633
SW2_BB_3.3 on L1 (SIG/PWR) "SW2_BB_3.3_L01_P014" (solid, pour order 14): 16.586,47.066 16.281,47.066 16.281,48.108 15.621,48.768 13.818,48.768 13.818,53.924 15.494,53.924 15.977,53.442 15.977,49.276 16.586,48.666
+3V3_DIG on L1 (SIG/PWR) "+3V3_DIG_L01_P011" (solid, pour order 11): 10.541,42.799 10.541,41.478 5.664,41.478 5.664,44.933 16.104,44.933 16.104,42.799 13.056,42.799
+3V3_DIG on L1 (SIG/PWR) "+3V3_DIG_L01_P077" (solid, pour order 77): 4.521,33.503 4.521,32.766 6.502,32.766 6.502,33.503 4.699,33.503
+3V3_DIG on L1 (SIG/PWR) "+3V3_DIG_L01_P078" (solid, pour order 78): 4.572,17.018 4.572,15.773 7.849,15.773 7.849,17.018 4.623,17.018
EN_LDO+ on L1 (SIG/PWR) "EN_LDO+_L01_P065" (solid, pour order 65): 38.913,23.368 37.135,23.368 36.627,22.86 36.627,21.285 37.567,21.285 37.567,22.479 38.202,23.114 38.913,23.114
NetC223_1 on L1 (SIG/PWR) "NETC223_1_L01_P064" (solid, pour order 64): 41.072,22.86 44.348,22.86 44.348,21.996 42.393,21.996 41.783,22.606 41.072,22.606
NetC233_1 on L1 (SIG/PWR) "NETC233_1_L01_P058" (solid, pour order 58): 40.919,50.114 40.183,50.114 39.751,50.546 37.821,50.546 37.821,49.632 40.005,49.632 40.005,49.759 40.132,49.886 40.919,49.886
+LED on L1 (SIG/PWR) "+LED_L01_P037" (solid, pour order 37): 5.486,40.183 5.486,36.22 6.045,36.22 6.045,40.183
+LED on L1 (SIG/PWR) "+LED_L01_P036" (solid, pour order 36): 10.744,35.255 13.741,35.255 13.741,34.087 12.497,34.087 11.557,35.027 10.744,35.027
SYS on L1 (SIG/PWR) "SYS_L01_P035" (solid, pour order 35): 11.913,35.789 12.395,36.271 13.284,36.271 13.284,35.458 11.633,35.458 11.557,35.535 10.719,35.535 10.719,35.789
NetC410_2 on L1 (SIG/PWR) "NETC410_2_L01_P034" (solid, pour order 34): 10.287,36.5 10.541,36.5 10.541,36.982 12.065,38.506 12.04,38.506 11.43,39.116 10.617,38.303 10.617,37.541 10.287,37.211
NetC410_1 on L1 (SIG/PWR) "NETC410_1_L01_P033" (solid, pour order 33): 10.744,36.043 11.862,36.043 13.183,37.363 12.548,37.998 12.446,37.998 10.744,36.297
NetC411_1 on L1 (SIG/PWR) "NETC411_1_L01_P032" (solid, pour order 32): 9.271,36.5 9.271,37.313 8.966,37.617 7.747,37.617 7.747,38.633 8.992,38.633 8.992,37.948 9.525,37.414 9.525,36.5
NetC411_2 on L1 (SIG/PWR) "NETC411_2_L01_P031" (solid, pour order 31): 10.033,36.5 10.033,37.313 10.363,37.643 10.363,38.659 9.22,38.659 9.22,37.973 9.779,37.414 9.779,36.5
no net on Top Overlay "NONET_L06_P-001" (solid): 24.695,15.079 ccw(c24.695,14.579) 24.195,14.579 24.195,14.512 ccw(c24.729,14.547) 24.695,14.012 ccw(c24.178,14.546)
no net on Top Overlay "NONET_L06_P-001" (solid): 28.457,8.826 ccw(c28.457,8.326) 27.957,8.326 27.957,8.259 ccw(c28.491,8.294) 28.457,7.759 ccw(c27.94,8.293)
no net on Top Overlay "NONET_L06_P-001" (solid): 8.01,41.017 ccw(c8.01,40.517) 7.511,40.517 7.511,40.45 ccw(c8.045,40.485) 8.01,39.95 ccw(c7.494,40.483)
no net on Top Overlay "NONET_L06_P-001" (solid): 44.699,27.059 ccw(c44.699,26.559) 44.199,26.559 44.199,26.492 ccw(c44.734,26.527) 44.699,25.992 ccw(c44.182,26.525)
no net on Top Overlay "NONET_L06_P-001" (solid): 31.375,53.77 ccw(c31.375,53.27) 30.875,53.27 30.875,53.203 ccw(c31.409,53.238) 31.375,52.703 ccw(c30.858,53.236)
no net on Top Overlay "NONET_L06_P-001" (solid): 7.424,49.487 ccw(c7.424,48.987) 6.924,48.987 6.924,48.92 ccw(c7.458,48.955) 7.424,48.42 ccw(c6.907,48.954)
no net on Top Overlay "NONET_L06_P-001" (solid): 30.118,40.892 ccw(c30.118,40.392) 29.618,40.392 29.618,40.326 ccw(c30.153,40.36) 30.118,39.826 ccw(c29.602,40.359)
no net on Top Overlay "NONET_L06_P-001" (solid): 43.076,54.136 ccw(c43.076,53.636) 42.576,53.636 42.576,53.569 ccw(c43.11,53.604) 43.076,53.069 ccw(c42.559,53.602)
no net on Top Overlay "NONET_L06_P-001" (solid): 24.056,30.15 ccw(c24.056,29.65) 23.556,29.65 23.556,29.583 ccw(c24.091,29.618) 24.056,29.083 ccw(c23.54,29.616)
GND on L6 (SIG/PWR) (solid, pour order 140): 0.123,3.15 ccw(c3.15,3.15) 3.15,0.123 27.178,0.123 30.226,0.127 47.549,0.102 47.549,2.769 45.441,2.769 44.145,4.064 44.145,6.579 42.367,6.579 41.173,7.772 41.173,9.347 31.293,9.347 29.058,11.582 27,11.582 26.289,12.294 26.289,14.249 23.241,14.249 23.241,12.09 25.527,12.09 25.527,10.211 25.959,9.779 26.467,9.779 26.467,6.96 30.048,6.96 30.048,3.048 28.016,3.048 26.772,1.829 25.502,1.829 18.408,8.922 18.408,33.037 23.005,37.49 36.017,37.49 36.017,44.51 36.001,44.526 36.017,44.51 54.864,44.526 54.864,51.89 ccw(c51.877,51.89) 51.877,54.877 3.123,54.877 ccw(c3.123,51.877) 0.123,51.877
SW_BQ on L6 (SIG/PWR) "SW_BQ_L06_P113" (solid, pour order 113): 15.926,8.28 16.51,8.865 16.51,10.846 15.672,10.846 15.672,10.312 14.427,10.312 14.427,9.093 15.113,8.407 15.113,7.671 15.926,7.671
VDD_SPI on L6 (SIG/PWR) "VDD_SPI_L06_P128" (solid, pour order 128): 14.199,25.273 14.199,28.575 16.154,28.575 16.154,26.289 15.138,25.273
-3V9 on L6 (SIG/PWR) "-3V9_L06_P103" (solid, pour order 103): 31.42,46.076 31.42,43.967 22.073,43.967 22.073,46.076 30.226,46.076
GND on L6 (SIG/PWR) "GND_L06_P119" (solid, pour order 119): 19.431,8.636 19.431,6.477 20.193,5.715 20.803,5.715 20.803,8.636
LDO_BQ on L6 (SIG/PWR) "LDO_BQ_L06_P116" (solid, pour order 116): 16.129,4.902 16.866,4.902 17.12,4.648 17.882,4.648 17.882,3.988 17.069,3.988 16.891,3.81 16.891,3.073 16.129,3.073
BAT+ on L6 (SIG/PWR) "BAT+_L06_P115" (solid, pour order 115): 11.074,7.493 12.878,7.493 12.878,6.604 11.074,6.604
SYS on L6 (SIG/PWR) "SYS_L06_P114" (solid, pour order 114): 11.481,19.202 11.481,17.882 12.116,17.882 12.116,11.43 13.056,10.49 13.056,7.671 13.868,7.671 13.868,8.509 14.122,8.763 14.122,19.202
PMID_BQ on L6 (SIG/PWR) "PMID_BQ_L06_P112" (solid, pour order 112): 16.129,6.883 17.12,6.883 17.932,7.696 19.228,7.696 19.228,6.655 17.348,6.655 16.129,6.655
VUSB on L6 (SIG/PWR) "VUSB_L06_P111" (solid, pour order 111): 16.129,7.137 16.129,7.925 17.297,9.093 18.161,9.093 19.05,9.982 19.05,11.862 21.412,11.862 21.412,8.814 18.364,8.814 16.688,7.137 16.586,7.137
NetC221_2 on L6 (SIG/PWR) "NETC221_2_L06_P110" (solid, pour order 110): 19.863,14.046 22.962,14.046 22.962,12.065 19.863,12.065 19.863,13.792
NetC219_2 on L6 (SIG/PWR) "NETC219_2_L06_P109" (solid, pour order 109): 21.615,6.985 26.137,6.985 26.137,9.601 25.73,9.601 25.197,10.135 25.197,11.862 21.615,11.862 21.615,7.442
-3V9 on L6 (SIG/PWR) "-3V9_L06_P089" (solid, pour order 89): 41.275,47.498 38.43,47.498 38.43,49.2 40.767,49.2 40.767,48.743 41.275,48.235
NetR204_1 on L6 (SIG/PWR) "NETR204_1_L06_P107" (solid, pour order 107): 27.076,48.057 27.076,46.228 28.296,46.228 28.296,48.057 27.356,48.057
NetC205_1 on L6 (SIG/PWR) "NETC205_1_L06_P108" (solid, pour order 108): 31.369,46.279 31.369,48.133 29.591,48.133 29.591,47.092 28.575,47.092 28.575,46.279
NetC201_2 on L6 (SIG/PWR) "NETC201_2_L06_P106" (solid, pour order 106): 29.693,49.327 29.693,54.458 31.14,54.458 31.14,49.327 30.175,49.327
NetC201_1 on L6 (SIG/PWR) "NETC201_1_L06_P104" (solid, pour order 104): 23.8,47.219 26.746,47.219 26.746,48.26 29.439,48.26 29.439,51.359 28.473,51.359 28.473,49.124 23.8,49.124
+3V9 on L6 (SIG/PWR) "+3V9_L06_P105" (solid, pour order 105): 24.892,49.352 24.892,52.273 25.756,52.273 26.822,53.34 26.822,54.432 28.296,54.432 28.296,49.352 27.864,49.352
+3V3_ANALOG on L6 (SIG/PWR) "+3V3_ANALOG_L06_P040" (solid, pour order 40): 47.117,30.124 47.117,28.194 46.355,28.194 46.355,30.124 46.457,30.124
-3V3 on L6 (SIG/PWR) "-3V3_L06_P090" (solid, pour order 90): 40.564,45.314 41.732,45.314 41.732,41.859 40.564,41.859
SET_LDO- on L6 (SIG/PWR) "SET_LDO-_L06_P088" (solid, pour order 88): 42.393,42.443 42.393,45.314 42.647,45.314 42.647,44.577 42.926,44.298 43.18,44.298 43.18,42.443
+3V3_DIG on L6 (SIG/PWR) "+3V3_DIG_L06_P068" (solid, pour order 68): 18.009,36.474 18.009,38.303 18.999,38.303 18.999,34.366 18.212,34.366 18.212,35.712 14.021,35.712 14.021,36.474
+3V3_ANALOG on L6 (SIG/PWR) "+3V3_ANALOG_L06_P056" (solid, pour order 56): 51.232,38.908 51.232,36.881 52.07,36.881 52.07,38.908
-3V3 on L6 (SIG/PWR) "-3V3_L06_P044" (solid, pour order 44): 48.59,41.935 48.59,40.081 49.505,40.081 49.505,41.935
-3V3 on L6 (SIG/PWR) "-3V3_L06_P043" (solid, pour order 43): 40.615,41.097 39.827,41.097 39.827,39.319 40.615,39.319
+3V3_ANALOG on L6 (SIG/PWR) "+3V3_ANALOG_L06_P042" (solid, pour order 42): 43.129,38.049 42.443,38.049 42.443,36.271 43.129,36.271
-3V3 on L6 (SIG/PWR) "-3V3_L06_P041" (solid, pour order 41): 44.526,33.299 44.526,31.344 43.663,31.344 43.663,33.299
+3V3_ANALOG on L6 (SIG/PWR) "+3V3_ANALOG_L06_P039" (solid, pour order 39): 46.328,27.102 46.328,25.361 46.785,24.904 46.785,24.142 47.166,23.761 47.166,23.202 47.346,23.202 47.346,27.102
-3V3 on L6 (SIG/PWR) "-3V3_L06_P038" (solid, pour order 38): 49.251,27.153 49.251,25.349 48.793,24.892 48.793,24.13 48.412,23.749 48.412,23.19 48.235,23.19 48.235,27.153
GND on L2 (GND) "GND_L02_P099" (solid, pour order 99): 3.123,0.123 21.031,0.123 51.877,0.123 ccw(c51.877,3.123) 54.877,3.123 54.877,51.877 ccw(c51.877,51.877) 51.877,54.877 3.123,54.877 ccw(c3.123,51.877) 0.123,51.877 0.123,3.123 ccw(c3.123,3.123)
no net on Bottom Overlay "NONET_L06_P-001" (solid): 45.663,44.058 ccw(c45.663,43.558) 45.163,43.558 45.163,43.492 ccw(c45.697,43.526) 45.663,42.992 ccw(c45.146,43.525)
no net on Bottom Overlay "NONET_L06_P-001" (solid): 4.27,25.712 ccw(c4.27,25.212) 3.77,25.212 3.77,25.145 ccw(c4.305,25.18) 4.27,24.645 ccw(c3.753,25.178)
no net on Bottom Overlay "NONET_L06_P-001" (solid): 45.946,46.135 ccw(c45.946,45.635) 45.446,45.635 45.446,45.568 ccw(c45.981,45.603) 45.946,45.068 ccw(c45.429,45.602)
no net on Bottom Overlay "NONET_L06_P-001" (solid): 25.871,41.926 ccw(c25.871,41.426) 25.371,41.426 25.371,41.359 ccw(c25.905,41.394) 25.871,40.859 ccw(c25.354,41.393)
no net on Bottom Overlay "NONET_L06_P-001" (solid): 13.464,49.121 ccw(c13.464,48.621) 12.964,48.621 12.964,48.554 ccw(c13.498,48.589) 13.464,48.054 ccw(c12.947,48.587)
no net on Bottom Overlay "NONET_L06_P-001" (solid): 15.102,12.878 ccw(c15.102,12.378) 14.602,12.378 14.602,12.311 ccw(c15.137,12.346) 15.102,11.811 ccw(c14.585,12.345)
no net on Bottom Overlay "NONET_L06_P-001" (solid): 5.749,47.032 ccw(c5.749,46.532) 5.249,46.532 5.249,46.465 ccw(c5.784,46.5) 5.749,45.965 ccw(c5.233,46.499)
no net on Bottom Overlay "NONET_L06_P-001" (solid): 38.642,22.729 ccw(c38.641,22.229) 38.142,22.229 38.142,22.162 ccw(c38.676,22.197) 38.642,21.662 ccw(c38.125,22.196)
+3V3_DIG on L4 (PWR) "+3V3_DIG_L04_P123" (solid, pour order 123): 3.123,0.123 21.031,0.123 28.067,0.123 28.067,54.877 3.123,54.877 ccw(c3.123,51.877) 0.123,51.877 0.123,3.123 ccw(c3.123,3.123)
GND on L4 (PWR) "GND_L04_P125" (solid, pour order 125): 27.889,54.877 33.68,54.877 33.68,0.123 27.889,0.123
-3V3 on L4 (PWR) "-3V3_L04_P102" (solid, pour order 102): 46.558,22.962 49.047,22.962 49.047,21.184 46.558,21.184 46.558,22.809
GND on L5 (GND) "GND_L05_P122" (solid, pour order 122): 3.123,0.123 21.031,0.123 51.877,0.123 ccw(c51.877,3.123) 54.877,3.123 54.877,51.877 ccw(c51.877,51.877) 51.877,54.877 3.123,54.877 ccw(c3.123,51.877) 0.123,51.877 0.123,3.123 ccw(c3.123,3.123)
GND on L3 (SIG) "GND_L03_P139" (solid, pour order 139): 3.123,0.123 21.031,0.123 51.877,0.123 ccw(c51.877,3.123) 54.877,3.123 54.877,51.877 ccw(c51.877,51.877) 51.877,54.877 3.123,54.877 ccw(c3.123,51.877) 0.123,51.877 0.123,3.123 ccw(c3.123,3.123)

## Silkscreen, mask and mechanical layers (free items; w line width, h text height)
Top Overlay:
  drawing of 82 lines, arcs and shapes, not listed
  text "3V3 DAC" at 43.549,53.383 h0.47
  text "3V9" at 31.887,53.002 h0.47
  text "3V3 DIGITAL" at 7.904,48.735 h0.47
  text "LED DRIVER" at 8.548,40.265 h0.47
  text "DAC" at 30.626,40.15 h0.47
  text "DIGITAL AUDIO PLAYER" at 38.448,39.659 h0.83
  text "ALEXANDER LOKER" at 39.954,38.364 h0.83
  text "MCU" at 24.566,29.38 h0.47
  text "3V3 ANALOG" at 45.168,26.307 h0.47
  text "UPLOAD" at 25.17,14.343 h0.47
  text "USB-C" at 29.019,8.069 h0.47
Bottom Overlay:
  drawing of 406 lines, arcs and shapes, not listed
  text "VOLUME +/-" at 18.883,48.354 h0.47
  text "SD-CARD" at 9.284,46.296 h0.47
  text "-3V3" at 48.15,45.382 h0.47
  text "ANALOG AUDIO STAGE" at 53.85,43.325 h0.47
  text "-3V9" at 28.16,41.191 h0.47
  text "POWER" at 7.128,24.96 h0.47
  text "OUTPUT OP-AMP" at 44.81,21.989 h0.47
  text "CHARGER" at 18.692,12.133 h0.47
Mechanical 1:
  the board outline again, w0.254

## Text inside footprints (layer, text, board x,y; h text height)
J201: Mechanical 13 "PCB EDGE" at 31.782,0.284 h0.81